# EAGLE board lopen-SR (EAGLE 5.11), part 1 of 2
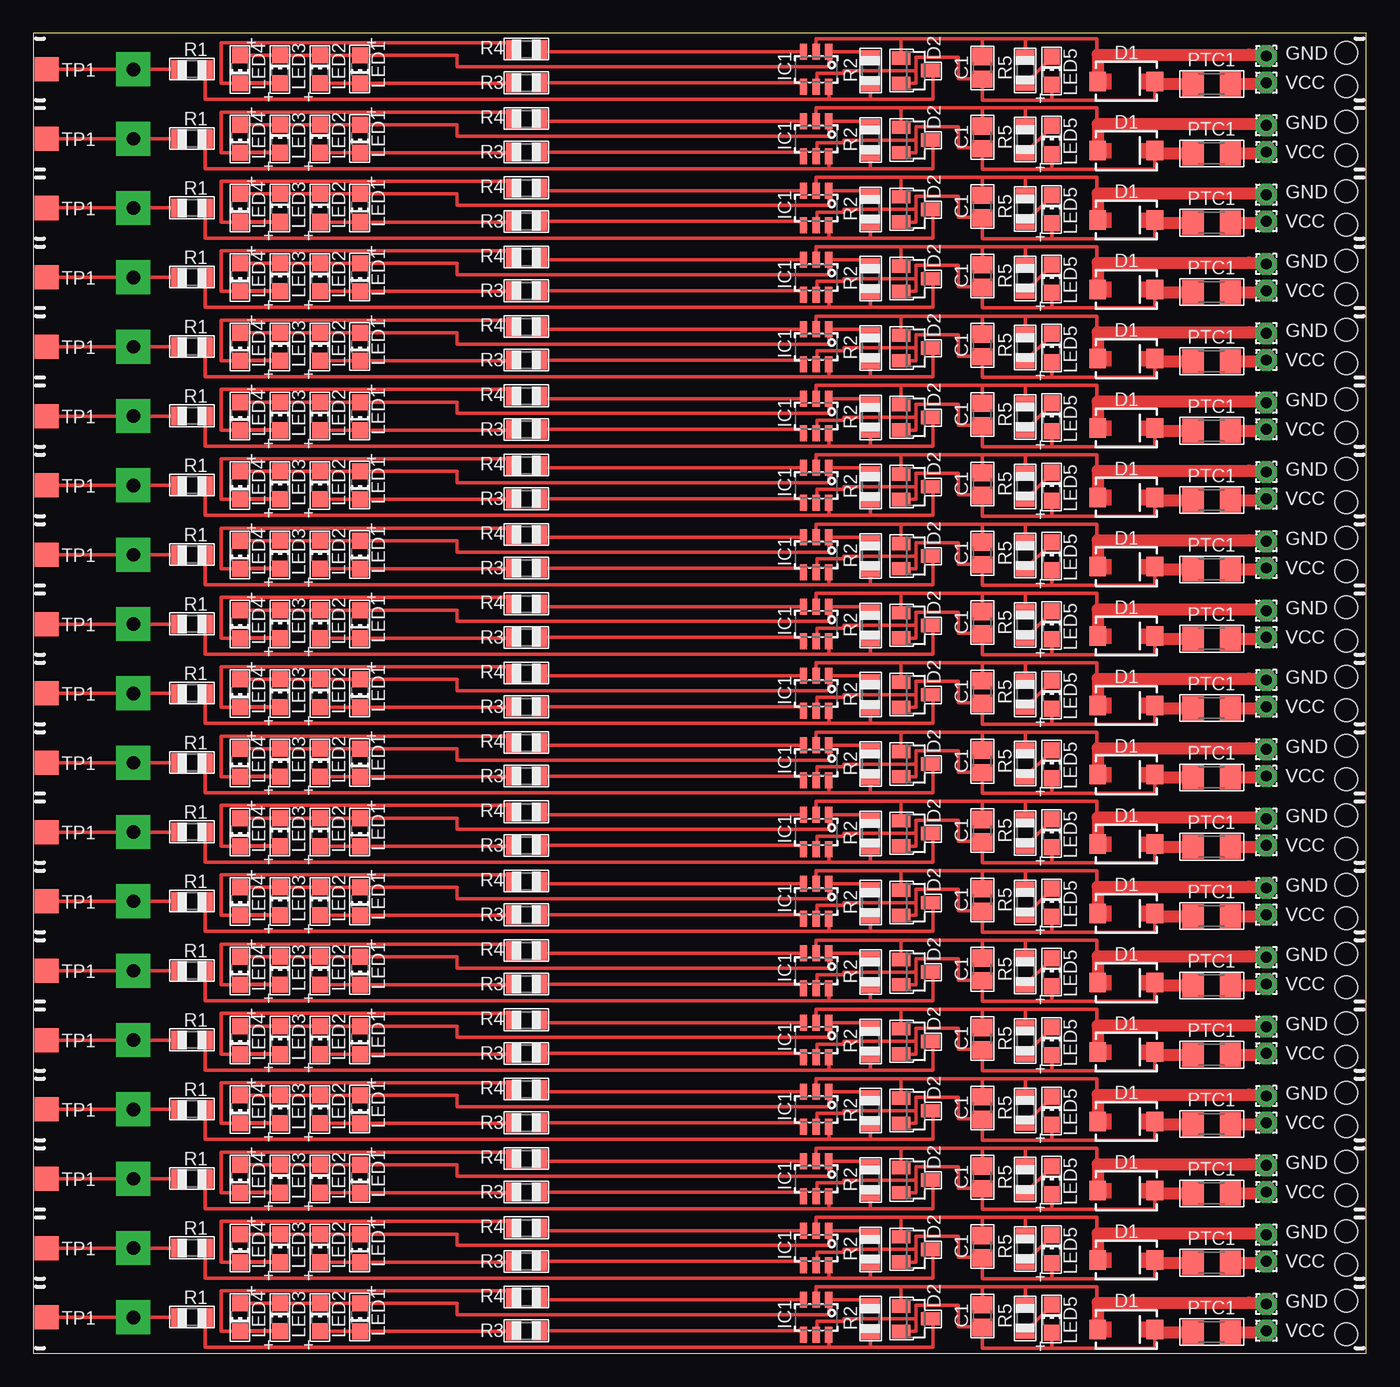
[diagram p0: board, top side]
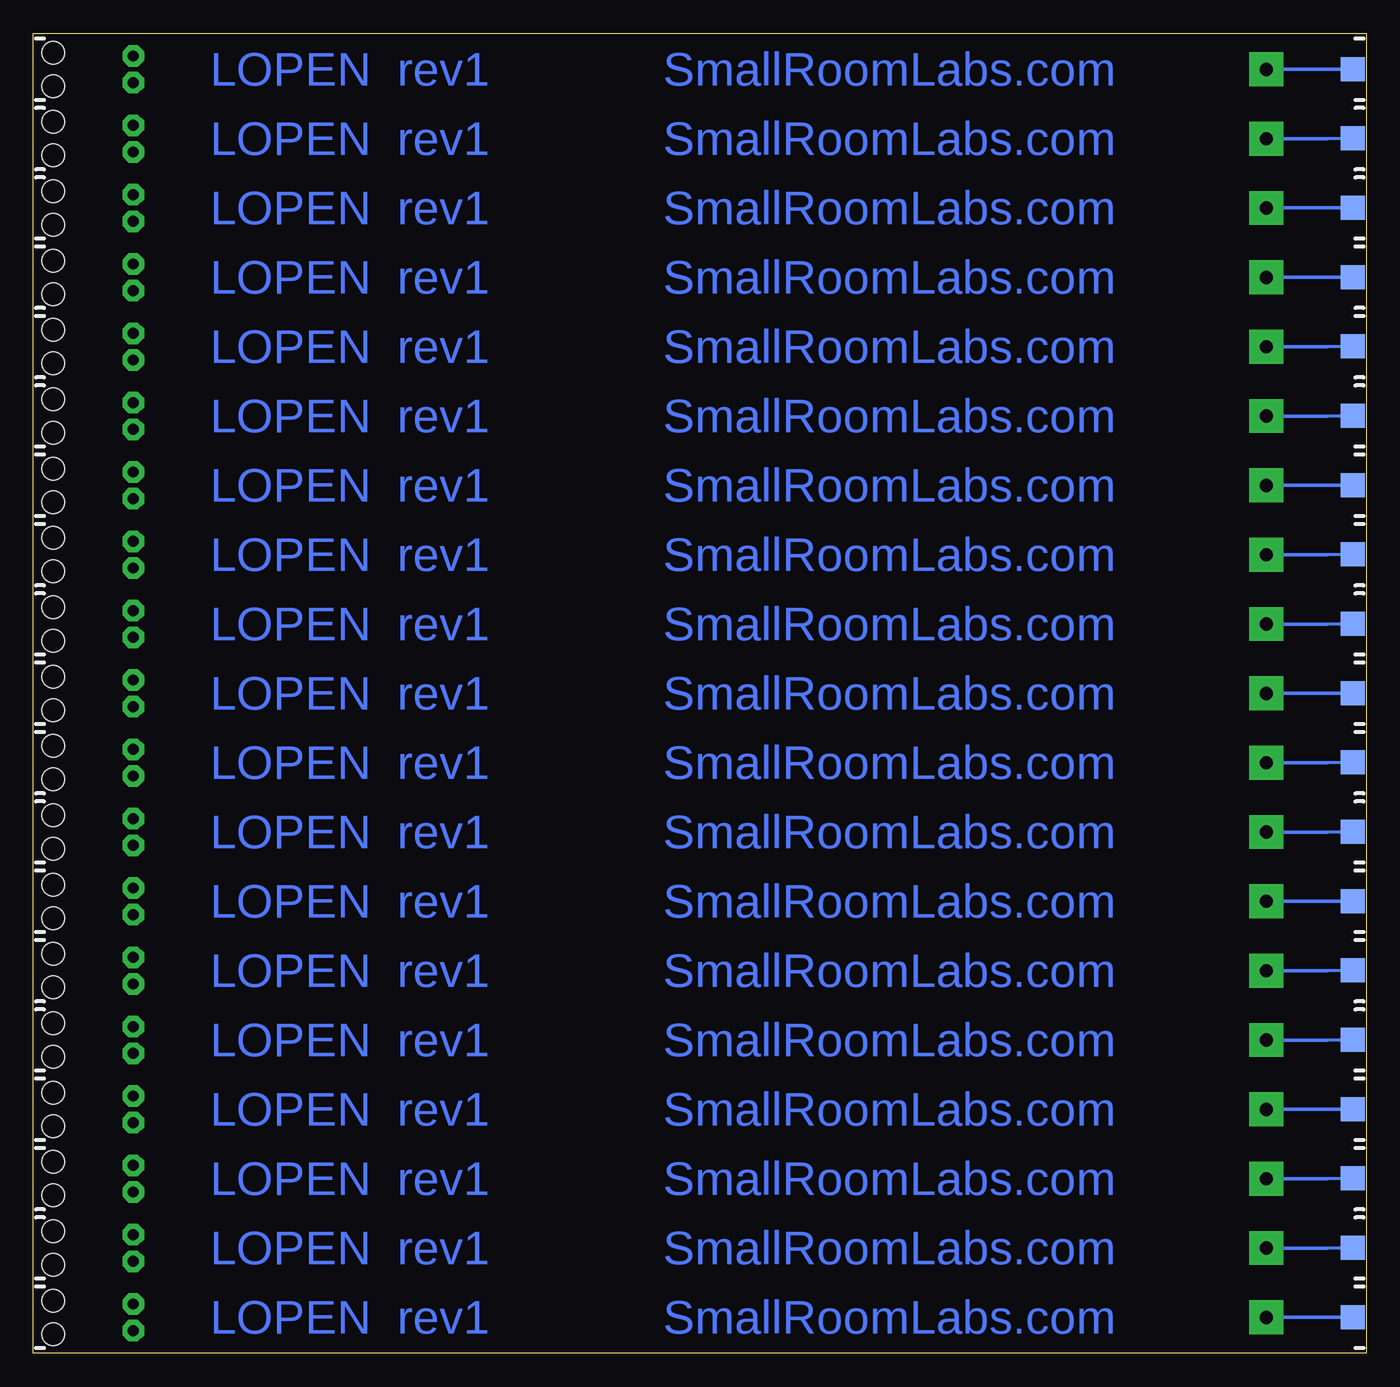
[diagram p1: board, bottom side, seen from below]

Size 100 x 99 mm. Coordinates in mm from the lower left corner, seen from the top.
Outline: 0,0 100,0 100,99 0,99 0,0
Copper layers (1*16): Top 0.035mm / dielectric 1.5mm / Bottom 0.035mm
Design rules "default": minimum track width 10mil, minimum drill 24mil, track to track 8mil, track to pad 8mil, pad to pad 8mil, via to via 8mil, smd to smd 8mil, copper to edge 40mil, drill to drill 8mil, minimum pad ring 10mil, minimum via ring 8mil, stop-mask expansion 4mil, vias tented up to drill 0mil, thermal gap 10mil
Net classes: 0 default: width 0.152 mm, clearance 0.152 mm
Holes 1.7 mm at 98.5,3.95 98.5,1.45 98.5,9.15 98.5,6.65 98.5,14.35 98.5,11.85 98.5,19.55 98.5,17.05 98.5,24.75 98.5,22.25 98.5,29.95 98.5,27.45 98.5,35.15 98.5,32.65 98.5,40.35 98.5,37.85 98.5,45.55 98.5,43.05 98.5,50.75 98.5,48.25 98.5,55.95 98.5,53.45 98.5,61.15 98.5,58.65 98.5,66.35 98.5,63.85 98.5,71.55 98.5,69.05 98.5,76.75 98.5,74.25 98.5,81.95 98.5,79.45 98.5,87.15 98.5,84.65 98.5,92.35 98.5,89.85 98.5,97.55 98.5,95.05

## Footprints (pad centres in the part's own frame; a part is rotated, then mirrored left to right if it is on the bottom)
C0805 = smd 1.3 x 1.5: 1 -0.85,0; 2 0.85,0
SMA-DIODE = smd 1.27 x 1.47: A -2.15,0; C 2.15,0
SOT23 = smd 1 x 1.4: 1 -0.95,-1.1; 2 0.95,-1.1; 3 0,1.1
1,6/0,8 = drill 0.813 pad 1.6 octagon: 1 0,0
SOT23-6 = smd 0.55 x 1.2: 1 0.32,-1.3; 2 1.27,-1.3; 3 2.22,-1.3; 4 2.22,1.3; 5 1.27,1.3; 6 0.32,1.3
CHIP-LED0805 = smd 1.2 x 1.2: A 0,-1.05; C 0,1.05
1206 = smd 1.6 x 1.8: 1 -1.4,0; 2 1.4,0
R0805 = smd 1.1 x 1.4: 1 -1,0; 2 1,0
TP18SQ = smd 1.8 x 1.8: TP 0,0

## Placement (x,y rotation side)
C1  [C0805]  71.2,2.8 90 top
C2  [C0805]  71.2,8 90 top
C3  [C0805]  71.2,13.2 90 top
C4  [C0805]  71.2,18.4 90 top
C5  [C0805]  71.2,23.6 90 top
C6  [C0805]  71.2,28.8 90 top
C7  [C0805]  71.2,34 90 top
C8  [C0805]  71.2,39.2 90 top
C9  [C0805]  71.2,44.4 90 top
C10  [C0805]  71.2,49.6 90 top
C11  [C0805]  71.2,54.8 90 top
C12  [C0805]  71.2,60 90 top
C13  [C0805]  71.2,65.2 90 top
C14  [C0805]  71.2,70.4 90 top
C15  [C0805]  71.2,75.6 90 top
C16  [C0805]  71.2,80.8 90 top
C17  [C0805]  71.2,86 90 top
C18  [C0805]  71.2,91.2 90 top
C19  [C0805]  71.2,96.4 90 top
D1  [SMA-DIODE]  82,1.8 0 top
D2  BAV99LT  [SOT23]  66.2,2.6 270 top
D3  BAV99LT  [SOT23]  66.2,7.8 270 top
D4  [SMA-DIODE]  82,7 0 top
D5  BAV99LT  [SOT23]  66.2,13 270 top
D6  [SMA-DIODE]  82,12.2 0 top
D7  BAV99LT  [SOT23]  66.2,18.2 270 top
D8  [SMA-DIODE]  82,17.4 0 top
D9  BAV99LT  [SOT23]  66.2,23.4 270 top
D10  [SMA-DIODE]  82,22.6 0 top
D11  BAV99LT  [SOT23]  66.2,28.6 270 top
D12  [SMA-DIODE]  82,27.8 0 top
D13  BAV99LT  [SOT23]  66.2,33.8 270 top
D14  [SMA-DIODE]  82,33 0 top
D15  BAV99LT  [SOT23]  66.2,39 270 top
D16  [SMA-DIODE]  82,38.2 0 top
D17  BAV99LT  [SOT23]  66.2,44.2 270 top
D18  [SMA-DIODE]  82,43.4 0 top
D19  BAV99LT  [SOT23]  66.2,49.4 270 top
D20  [SMA-DIODE]  82,48.6 0 top
D21  BAV99LT  [SOT23]  66.2,54.6 270 top
D22  [SMA-DIODE]  82,53.8 0 top
D23  BAV99LT  [SOT23]  66.2,59.8 270 top
D24  [SMA-DIODE]  82,59 0 top
D25  BAV99LT  [SOT23]  66.2,65 270 top
D26  [SMA-DIODE]  82,64.2 0 top
D27  BAV99LT  [SOT23]  66.2,70.2 270 top
D28  [SMA-DIODE]  82,69.4 0 top
D29  BAV99LT  [SOT23]  66.2,75.4 270 top
D30  [SMA-DIODE]  82,74.6 0 top
D31  BAV99LT  [SOT23]  66.2,80.6 270 top
D32  [SMA-DIODE]  82,79.8 0 top
D33  BAV99LT  [SOT23]  66.2,85.8 270 top
D34  [SMA-DIODE]  82,85 0 top
D35  BAV99LT  [SOT23]  66.2,91 270 top
D36  [SMA-DIODE]  82,90.2 0 top
D37  BAV99LT  [SOT23]  66.2,96.2 270 top
D38  [SMA-DIODE]  82,95.4 0 top
GND  [1,6/0,8]  92.5,3.7 0 top
GND1  [1,6/0,8]  92.5,8.9 0 top
GND2  [1,6/0,8]  92.5,14.1 0 top
GND3  [1,6/0,8]  92.5,19.3 0 top
GND4  [1,6/0,8]  92.5,24.5 0 top
GND5  [1,6/0,8]  92.5,29.7 0 top
GND6  [1,6/0,8]  92.5,34.9 0 top
GND7  [1,6/0,8]  92.5,40.1 0 top
GND8  [1,6/0,8]  92.5,45.3 0 top
GND9  [1,6/0,8]  92.5,50.5 0 top
GND10  [1,6/0,8]  92.5,55.7 0 top
GND11  [1,6/0,8]  92.5,60.9 0 top
GND12  [1,6/0,8]  92.5,66.1 0 top
GND13  [1,6/0,8]  92.5,71.3 0 top
GND14  [1,6/0,8]  92.5,76.5 0 top
GND15  [1,6/0,8]  92.5,81.7 0 top
GND16  [1,6/0,8]  92.5,86.9 0 top
GND17  [1,6/0,8]  92.5,92.1 0 top
GND18  [1,6/0,8]  92.5,97.3 0 top
IC1  PIC10F200-SOT23  [SOT23-6]  60,2.7 180 top
IC2  PIC10F200-SOT23  [SOT23-6]  60,7.9 180 top
IC3  PIC10F200-SOT23  [SOT23-6]  60,13.1 180 top
IC4  PIC10F200-SOT23  [SOT23-6]  60,18.3 180 top
IC5  PIC10F200-SOT23  [SOT23-6]  60,23.5 180 top
IC6  PIC10F200-SOT23  [SOT23-6]  60,28.7 180 top
IC7  PIC10F200-SOT23  [SOT23-6]  60,33.9 180 top
IC8  PIC10F200-SOT23  [SOT23-6]  60,39.1 180 top
IC9  PIC10F200-SOT23  [SOT23-6]  60,44.3 180 top
IC10  PIC10F200-SOT23  [SOT23-6]  60,49.5 180 top
IC11  PIC10F200-SOT23  [SOT23-6]  60,54.7 180 top
IC12  PIC10F200-SOT23  [SOT23-6]  60,59.9 180 top
IC13  PIC10F200-SOT23  [SOT23-6]  60,65.1 180 top
IC14  PIC10F200-SOT23  [SOT23-6]  60,70.3 180 top
IC15  PIC10F200-SOT23  [SOT23-6]  60,75.5 180 top
IC16  PIC10F200-SOT23  [SOT23-6]  60,80.7 180 top
IC17  PIC10F200-SOT23  [SOT23-6]  60,85.9 180 top
IC18  PIC10F200-SOT23  [SOT23-6]  60,91.1 180 top
IC19  PIC10F200-SOT23  [SOT23-6]  60,96.3 180 top
LED1  [CHIP-LED0805]  24.5,2.7 180 top
LED2  [CHIP-LED0805]  21.5,2.7 0 top
LED3  [CHIP-LED0805]  18.5,2.7 0 top
LED4  [CHIP-LED0805]  15.5,2.7 180 top
LED5  [CHIP-LED0805]  76.4,2.6 0 top
LED6  [CHIP-LED0805]  24.5,7.9 180 top
LED7  [CHIP-LED0805]  21.5,7.9 0 top
LED8  [CHIP-LED0805]  18.5,7.9 0 top
LED9  [CHIP-LED0805]  15.5,7.9 180 top
LED10  [CHIP-LED0805]  76.4,7.8 0 top
LED11  [CHIP-LED0805]  24.5,13.1 180 top
LED12  [CHIP-LED0805]  21.5,13.1 0 top
LED13  [CHIP-LED0805]  18.5,13.1 0 top
LED14  [CHIP-LED0805]  15.5,13.1 180 top
LED15  [CHIP-LED0805]  76.4,13 0 top
LED16  [CHIP-LED0805]  24.5,18.3 180 top
LED17  [CHIP-LED0805]  21.5,18.3 0 top
LED18  [CHIP-LED0805]  18.5,18.3 0 top
LED19  [CHIP-LED0805]  15.5,18.3 180 top
LED20  [CHIP-LED0805]  76.4,18.2 0 top
LED21  [CHIP-LED0805]  24.5,23.5 180 top
LED22  [CHIP-LED0805]  21.5,23.5 0 top
LED23  [CHIP-LED0805]  18.5,23.5 0 top
LED24  [CHIP-LED0805]  15.5,23.5 180 top
LED25  [CHIP-LED0805]  76.4,23.4 0 top
LED26  [CHIP-LED0805]  24.5,28.7 180 top
LED27  [CHIP-LED0805]  21.5,28.7 0 top
LED28  [CHIP-LED0805]  18.5,28.7 0 top
LED29  [CHIP-LED0805]  15.5,28.7 180 top
LED30  [CHIP-LED0805]  76.4,28.6 0 top
LED31  [CHIP-LED0805]  24.5,33.9 180 top
LED32  [CHIP-LED0805]  21.5,33.9 0 top
LED33  [CHIP-LED0805]  18.5,33.9 0 top
LED34  [CHIP-LED0805]  15.5,33.9 180 top
LED35  [CHIP-LED0805]  76.4,33.8 0 top
LED36  [CHIP-LED0805]  24.5,39.1 180 top
LED37  [CHIP-LED0805]  21.5,39.1 0 top
LED38  [CHIP-LED0805]  18.5,39.1 0 top
LED39  [CHIP-LED0805]  15.5,39.1 180 top
LED40  [CHIP-LED0805]  76.4,39 0 top
LED41  [CHIP-LED0805]  24.5,44.3 180 top
LED42  [CHIP-LED0805]  21.5,44.3 0 top
LED43  [CHIP-LED0805]  18.5,44.3 0 top
LED44  [CHIP-LED0805]  15.5,44.3 180 top
LED45  [CHIP-LED0805]  76.4,44.2 0 top
LED46  [CHIP-LED0805]  24.5,49.5 180 top
LED47  [CHIP-LED0805]  21.5,49.5 0 top
LED48  [CHIP-LED0805]  18.5,49.5 0 top
LED49  [CHIP-LED0805]  15.5,49.5 180 top
LED50  [CHIP-LED0805]  76.4,49.4 0 top
LED51  [CHIP-LED0805]  24.5,54.7 180 top
LED52  [CHIP-LED0805]  21.5,54.7 0 top
LED53  [CHIP-LED0805]  18.5,54.7 0 top
LED54  [CHIP-LED0805]  15.5,54.7 180 top
LED55  [CHIP-LED0805]  76.4,54.6 0 top
LED56  [CHIP-LED0805]  24.5,59.9 180 top
LED57  [CHIP-LED0805]  21.5,59.9 0 top
LED58  [CHIP-LED0805]  18.5,59.9 0 top
LED59  [CHIP-LED0805]  15.5,59.9 180 top
LED60  [CHIP-LED0805]  76.4,59.8 0 top
LED61  [CHIP-LED0805]  24.5,65.1 180 top
LED62  [CHIP-LED0805]  21.5,65.1 0 top
LED63  [CHIP-LED0805]  18.5,65.1 0 top
LED64  [CHIP-LED0805]  15.5,65.1 180 top
LED65  [CHIP-LED0805]  76.4,65 0 top
LED66  [CHIP-LED0805]  24.5,70.3 180 top
LED67  [CHIP-LED0805]  21.5,70.3 0 top
LED68  [CHIP-LED0805]  18.5,70.3 0 top
LED69  [CHIP-LED0805]  15.5,70.3 180 top
LED70  [CHIP-LED0805]  76.4,70.2 0 top
LED71  [CHIP-LED0805]  24.5,75.5 180 top
LED72  [CHIP-LED0805]  21.5,75.5 0 top
LED73  [CHIP-LED0805]  18.5,75.5 0 top
LED74  [CHIP-LED0805]  15.5,75.5 180 top
LED75  [CHIP-LED0805]  76.4,75.4 0 top
LED76  [CHIP-LED0805]  24.5,80.7 180 top
LED77  [CHIP-LED0805]  21.5,80.7 0 top
LED78  [CHIP-LED0805]  18.5,80.7 0 top
LED79  [CHIP-LED0805]  15.5,80.7 180 top
LED80  [CHIP-LED0805]  76.4,80.6 0 top
LED81  [CHIP-LED0805]  24.5,85.9 180 top
LED82  [CHIP-LED0805]  21.5,85.9 0 top
LED83  [CHIP-LED0805]  18.5,85.9 0 top
LED84  [CHIP-LED0805]  15.5,85.9 180 top
LED85  [CHIP-LED0805]  76.4,85.8 0 top
LED86  [CHIP-LED0805]  24.5,91.1 180 top
LED87  [CHIP-LED0805]  21.5,91.1 0 top
LED88  [CHIP-LED0805]  18.5,91.1 0 top
LED89  [CHIP-LED0805]  15.5,91.1 180 top
LED90  [CHIP-LED0805]  76.4,91 0 top
LED91  [CHIP-LED0805]  24.5,96.3 180 top
LED92  [CHIP-LED0805]  21.5,96.3 0 top
LED93  [CHIP-LED0805]  18.5,96.3 0 top
LED94  [CHIP-LED0805]  15.5,96.3 180 top
LED95  [CHIP-LED0805]  76.4,96.2 0 top
PTC1  MC36205  [1206]  88.4,1.6 0 top
PTC2  MC36205  [1206]  88.4,6.8 0 top
PTC3  MC36205  [1206]  88.4,12 0 top
PTC4  MC36205  [1206]  88.4,17.2 0 top
PTC5  MC36205  [1206]  88.4,22.4 0 top
PTC6  MC36205  [1206]  88.4,27.6 0 top
PTC7  MC36205  [1206]  88.4,32.8 0 top
PTC8  MC36205  [1206]  88.4,38 0 top
PTC9  MC36205  [1206]  88.4,43.2 0 top
PTC10  MC36205  [1206]  88.4,48.4 0 top
PTC11  MC36205  [1206]  88.4,53.6 0 top
PTC12  MC36205  [1206]  88.4,58.8 0 top
PTC13  MC36205  [1206]  88.4,64 0 top
PTC14  MC36205  [1206]  88.4,69.2 0 top
PTC15  MC36205  [1206]  88.4,74.4 0 top
PTC16  MC36205  [1206]  88.4,79.6 0 top
PTC17  MC36205  [1206]  88.4,84.8 0 top
PTC18  MC36205  [1206]  88.4,90 0 top
PTC19  MC36205  [1206]  88.4,95.2 0 top
R1  [R0805]  11.9,2.7 180 top
R2  [R0805]  62.8,2.6 270 top
R3  [R0805]  37,1.7 0 top
R4  [R0805]  37,4.2 0 top
R5  [R0805]  74.42,2.63 270 top
R6  [R0805]  11.9,7.9 180 top
R7  [R0805]  62.8,7.8 270 top
R8  [R0805]  37,6.9 0 top
R9  [R0805]  37,9.4 0 top
R10  [R0805]  74.42,7.83 270 top
R11  [R0805]  11.9,13.1 180 top
R12  [R0805]  62.8,13 270 top
R13  [R0805]  37,12.1 0 top
R14  [R0805]  37,14.6 0 top
R15  [R0805]  74.42,13.03 270 top
R16  [R0805]  11.9,18.3 180 top
R17  [R0805]  62.8,18.2 270 top
R18  [R0805]  37,17.3 0 top
R19  [R0805]  37,19.8 0 top
R20  [R0805]  74.42,18.23 270 top
R21  [R0805]  11.9,23.5 180 top
R22  [R0805]  62.8,23.4 270 top
R23  [R0805]  37,22.5 0 top
R24  [R0805]  37,25 0 top
R25  [R0805]  74.42,23.43 270 top
R26  [R0805]  11.9,28.7 180 top
R27  [R0805]  62.8,28.6 270 top
R28  [R0805]  37,27.7 0 top
R29  [R0805]  37,30.2 0 top
R30  [R0805]  74.42,28.63 270 top
R31  [R0805]  11.9,33.9 180 top
R32  [R0805]  62.8,33.8 270 top
R33  [R0805]  37,32.9 0 top
R34  [R0805]  37,35.4 0 top
R35  [R0805]  74.42,33.83 270 top
R36  [R0805]  11.9,39.1 180 top
R37  [R0805]  62.8,39 270 top
R38  [R0805]  37,38.1 0 top
R39  [R0805]  37,40.6 0 top
R40  [R0805]  74.42,39.03 270 top
R41  [R0805]  11.9,44.3 180 top
R42  [R0805]  62.8,44.2 270 top
R43  [R0805]  37,43.3 0 top
R44  [R0805]  37,45.8 0 top
R45  [R0805]  74.42,44.23 270 top
R46  [R0805]  11.9,49.5 180 top
R47  [R0805]  62.8,49.4 270 top
R48  [R0805]  37,48.5 0 top
R49  [R0805]  37,51 0 top
R50  [R0805]  74.42,49.43 270 top
R51  [R0805]  11.9,54.7 180 top
R52  [R0805]  62.8,54.6 270 top
R53  [R0805]  37,53.7 0 top
R54  [R0805]  37,56.2 0 top
R55  [R0805]  74.42,54.63 270 top
R56  [R0805]  11.9,59.9 180 top
R57  [R0805]  62.8,59.8 270 top
R58  [R0805]  37,58.9 0 top
R59  [R0805]  37,61.4 0 top
R60  [R0805]  74.42,59.83 270 top
R61  [R0805]  11.9,65.1 180 top
R62  [R0805]  62.8,65 270 top
R63  [R0805]  37,64.1 0 top
R64  [R0805]  37,66.6 0 top
R65  [R0805]  74.42,65.03 270 top
R66  [R0805]  11.9,70.3 180 top
R67  [R0805]  62.8,70.2 270 top
R68  [R0805]  37,69.3 0 top
R69  [R0805]  37,71.8 0 top
R70  [R0805]  74.42,70.23 270 top
R71  [R0805]  11.9,75.5 180 top
R72  [R0805]  62.8,75.4 270 top
R73  [R0805]  37,74.5 0 top
R74  [R0805]  37,77 0 top
R75  [R0805]  74.42,75.43 270 top
R76  [R0805]  11.9,80.7 180 top
R77  [R0805]  62.8,80.6 270 top
R78  [R0805]  37,79.7 0 top
R79  [R0805]  37,82.2 0 top
R80  [R0805]  74.42,80.63 270 top
R81  [R0805]  11.9,85.9 180 top
R82  [R0805]  62.8,85.8 270 top
R83  [R0805]  37,84.9 0 top
R84  [R0805]  37,87.4 0 top
R85  [R0805]  74.42,85.83 270 top
R86  [R0805]  11.9,91.1 180 top
R87  [R0805]  62.8,91 270 top
R88  [R0805]  37,90.1 0 top
R89  [R0805]  37,92.6 0 top
R90  [R0805]  74.42,91.03 270 top
R91  [R0805]  11.9,96.3 180 top
R92  [R0805]  62.8,96.2 270 top
R93  [R0805]  37,95.3 0 top
R94  [R0805]  37,97.8 0 top
R95  [R0805]  74.42,96.23 270 top
TP1  TPSQTP18SQ  [TP18SQ]  1,2.7 0 top
TP2  TPSQTP18SQ  [TP18SQ]  1.02,2.71 0 bottom
TP3  TPSQTP18SQ  [TP18SQ]  1,7.9 0 top
TP4  TPSQTP18SQ  [TP18SQ]  1.02,7.91 0 bottom
TP5  TPSQTP18SQ  [TP18SQ]  1,13.1 0 top
TP6  TPSQTP18SQ  [TP18SQ]  1.02,13.11 0 bottom
TP7  TPSQTP18SQ  [TP18SQ]  1,18.3 0 top
TP8  TPSQTP18SQ  [TP18SQ]  1.02,18.31 0 bottom
TP9  TPSQTP18SQ  [TP18SQ]  1,23.5 0 top
TP10  TPSQTP18SQ  [TP18SQ]  1.02,23.51 0 bottom
TP11  TPSQTP18SQ  [TP18SQ]  1,28.7 0 top
TP12  TPSQTP18SQ  [TP18SQ]  1.02,28.71 0 bottom
TP13  TPSQTP18SQ  [TP18SQ]  1,33.9 0 top
TP14  TPSQTP18SQ  [TP18SQ]  1.02,33.91 0 bottom
TP15  TPSQTP18SQ  [TP18SQ]  1,39.1 0 top
TP16  TPSQTP18SQ  [TP18SQ]  1.02,39.11 0 bottom
TP17  TPSQTP18SQ  [TP18SQ]  1,44.3 0 top
TP18  TPSQTP18SQ  [TP18SQ]  1.02,44.31 0 bottom
TP19  TPSQTP18SQ  [TP18SQ]  1,49.5 0 top
TP20  TPSQTP18SQ  [TP18SQ]  1.02,49.51 0 bottom
TP21  TPSQTP18SQ  [TP18SQ]  1,54.7 0 top
TP22  TPSQTP18SQ  [TP18SQ]  1.02,54.71 0 bottom
TP23  TPSQTP18SQ  [TP18SQ]  1,59.9 0 top
TP24  TPSQTP18SQ  [TP18SQ]  1.02,59.91 0 bottom
TP25  TPSQTP18SQ  [TP18SQ]  1,65.1 0 top
TP26  TPSQTP18SQ  [TP18SQ]  1.02,65.11 0 bottom
TP27  TPSQTP18SQ  [TP18SQ]  1,70.3 0 top
TP28  TPSQTP18SQ  [TP18SQ]  1.02,70.31 0 bottom
TP29  TPSQTP18SQ  [TP18SQ]  1,75.5 0 top
TP30  TPSQTP18SQ  [TP18SQ]  1.02,75.51 0 bottom
TP31  TPSQTP18SQ  [TP18SQ]  1,80.7 0 top
TP32  TPSQTP18SQ  [TP18SQ]  1.02,80.71 0 bottom
TP33  TPSQTP18SQ  [TP18SQ]  1,85.9 0 top
TP34  TPSQTP18SQ  [TP18SQ]  1.02,85.91 0 bottom
TP35  TPSQTP18SQ  [TP18SQ]  1,91.1 0 top
TP36  TPSQTP18SQ  [TP18SQ]  1.02,91.11 0 bottom
TP37  TPSQTP18SQ  [TP18SQ]  1,96.3 0 top
TP38  TPSQTP18SQ  [TP18SQ]  1.02,96.31 0 bottom
VCC  [1,6/0,8]  92.5,1.7 0 top
VCC1  [1,6/0,8]  92.5,6.9 0 top
VCC2  [1,6/0,8]  92.5,12.1 0 top
VCC3  [1,6/0,8]  92.5,17.3 0 top
VCC4  [1,6/0,8]  92.5,22.5 0 top
VCC5  [1,6/0,8]  92.5,27.7 0 top
VCC6  [1,6/0,8]  92.5,32.9 0 top
VCC7  [1,6/0,8]  92.5,38.1 0 top
VCC8  [1,6/0,8]  92.5,43.3 0 top
VCC9  [1,6/0,8]  92.5,48.5 0 top
VCC10  [1,6/0,8]  92.5,53.7 0 top
VCC11  [1,6/0,8]  92.5,58.9 0 top
VCC12  [1,6/0,8]  92.5,64.1 0 top
VCC13  [1,6/0,8]  92.5,69.3 0 top
VCC14  [1,6/0,8]  92.5,74.5 0 top
VCC15  [1,6/0,8]  92.5,79.7 0 top
VCC16  [1,6/0,8]  92.5,84.9 0 top
VCC17  [1,6/0,8]  92.5,90.1 0 top
VCC18  [1,6/0,8]  92.5,95.3 0 top

## Library data of the parts
C1-C19 LED1-LED95 R1-R95 = adafruit
D1 D4 D6 D8 D10 D12 D14 D16 D18 D20 D22 D24 D26 D28 D30 D32 D34 D36 D38 = SparkFun
D2 D3 D5 D7 D9 D11 D13 D15 D17 D19 D21 D23 D25 D27 D29 D31 D33 D35 D37 = diode
GND GND1-GND18 VCC VCC1-VCC18 = wirepad
IC1-IC19 = SmallRoomLabs
PTC1-PTC19 = microbuilder
TP1-TP38 = testpad

## Nets
GND: C1.2 D1.A D2.1 GND.1 IC1.2 R5.1
GND1: C2.2 D3.1 D4.A GND1.1 IC2.2 R10.1
GND2: C3.2 D5.1 D6.A GND2.1 IC3.2 R15.1
GND3: C4.2 D7.1 D8.A GND3.1 IC4.2 R20.1
GND4: C5.2 D9.1 D10.A GND4.1 IC5.2 R25.1
GND5: C6.2 D11.1 D12.A GND5.1 IC6.2 R30.1
GND6: C7.2 D13.1 D14.A GND6.1 IC7.2 R35.1
GND7: C8.2 D15.1 D16.A GND7.1 IC8.2 R40.1
GND8: C9.2 D17.1 D18.A GND8.1 IC9.2 R45.1
GND9: C10.2 D19.1 D20.A GND9.1 IC10.2 R50.1
GND10: C11.2 D21.1 D22.A GND10.1 IC11.2 R55.1
GND11: C12.2 D23.1 D24.A GND11.1 IC12.2 R60.1
GND12: C13.2 D25.1 D26.A GND12.1 IC13.2 R65.1
GND13: C14.2 D27.1 D28.A GND13.1 IC14.2 R70.1
GND14: C15.2 D29.1 D30.A GND14.1 IC15.2 R75.1
GND15: C16.2 D31.1 D32.A GND15.1 IC16.2 R80.1
GND16: C17.2 D33.1 D34.A GND16.1 IC17.2 R85.1
GND17: C18.2 D35.1 D36.A GND17.1 IC18.2 R90.1
GND18: C19.2 D37.1 D38.A GND18.1 IC19.2 R95.1
LED_CENTER: IC1.1 LED1.A LED2.C LED3.C LED4.A R2.1
LED_CENTER1: IC2.1 LED6.A LED7.C LED8.C LED9.A R7.1
LED_CENTER2: IC3.1 LED11.A LED12.C LED13.C LED14.A R12.1
LED_CENTER3: IC4.1 LED16.A LED17.C LED18.C LED19.A R17.1
LED_CENTER4: IC5.1 LED21.A LED22.C LED23.C LED24.A R22.1
LED_CENTER5: IC6.1 LED26.A LED27.C LED28.C LED29.A R27.1
LED_CENTER6: IC7.1 LED31.A LED32.C LED33.C LED34.A R32.1
LED_CENTER7: IC8.1 LED36.A LED37.C LED38.C LED39.A R37.1
LED_CENTER8: IC9.1 LED41.A LED42.C LED43.C LED44.A R42.1
LED_CENTER9: IC10.1 LED46.A LED47.C LED48.C LED49.A R47.1
LED_CENTER10: IC11.1 LED51.A LED52.C LED53.C LED54.A R52.1
LED_CENTER11: IC12.1 LED56.A LED57.C LED58.C LED59.A R57.1
LED_CENTER12: IC13.1 LED61.A LED62.C LED63.C LED64.A R62.1
LED_CENTER13: IC14.1 LED66.A LED67.C LED68.C LED69.A R67.1
LED_CENTER14: IC15.1 LED71.A LED72.C LED73.C LED74.A R72.1
LED_CENTER15: IC16.1 LED76.A LED77.C LED78.C LED79.A R77.1
LED_CENTER16: IC17.1 LED81.A LED82.C LED83.C LED84.A R82.1
LED_CENTER17: IC18.1 LED86.A LED87.C LED88.C LED89.A R87.1
LED_CENTER18: IC19.1 LED91.A LED92.C LED93.C LED94.A R92.1
LED_ONE: IC1.4 R3.2
LED_ONE1: IC2.4 R8.2
LED_ONE2: IC3.4 R13.2
LED_ONE3: IC4.4 R18.2
LED_ONE4: IC5.4 R23.2
LED_ONE5: IC6.4 R28.2
LED_ONE6: IC7.4 R33.2
LED_ONE7: IC8.4 R38.2
LED_ONE8: IC9.4 R43.2
LED_ONE9: IC10.4 R48.2
LED_ONE10: IC11.4 R53.2
LED_ONE11: IC12.4 R58.2
LED_ONE12: IC13.4 R63.2
LED_ONE13: IC14.4 R68.2
LED_ONE14: IC15.4 R73.2
LED_ONE15: IC16.4 R78.2
LED_ONE16: IC17.4 R83.2
LED_ONE17: IC18.4 R88.2
LED_ONE18: IC19.4 R93.2
LED_TWO: IC1.3 R4.2
LED_TWO1: IC2.3 R9.2
LED_TWO2: IC3.3 R14.2
LED_TWO3: IC4.3 R19.2
LED_TWO4: IC5.3 R24.2
LED_TWO5: IC6.3 R29.2
LED_TWO6: IC7.3 R34.2
LED_TWO7: IC8.3 R39.2
LED_TWO8: IC9.3 R44.2
LED_TWO9: IC10.3 R49.2
LED_TWO10: IC11.3 R54.2
LED_TWO11: IC12.3 R59.2
LED_TWO12: IC13.3 R64.2
LED_TWO13: IC14.3 R69.2
LED_TWO14: IC15.3 R74.2
LED_TWO15: IC16.3 R79.2
LED_TWO16: IC17.3 R84.2
LED_TWO17: IC18.3 R89.2
LED_TWO18: IC19.3 R94.2
N$1: LED5.C R5.2
N$2: PTC1.2 VCC.1
N$3: LED6.C LED7.A R8.1
N$4: LED8.A LED9.C R9.1
N$5: LED1.C LED2.A R3.1
N$6: LED3.A LED4.C R4.1
N$7: R6.2 TP3.TP TP4.TP
N$8: LED10.C R10.2
N$9: R1.2 TP1.TP TP2.TP
N$10: PTC2.2 VCC1.1
N$11: LED11.C LED12.A R13.1
N$12: LED13.A LED14.C R14.1
N$13: R11.2 TP5.TP TP6.TP
N$14: LED15.C R15.2
N$15: PTC3.2 VCC2.1
N$16: LED16.C LED17.A R18.1
N$17: LED18.A LED19.C R19.1
N$18: R16.2 TP7.TP TP8.TP
N$19: LED20.C R20.2
N$20: PTC4.2 VCC3.1
N$21: LED21.C LED22.A R23.1
N$22: LED23.A LED24.C R24.1
N$23: R21.2 TP9.TP TP10.TP
N$24: LED25.C R25.2
N$25: PTC5.2 VCC4.1
N$26: LED26.C LED27.A R28.1
N$27: LED28.A LED29.C R29.1
N$28: R26.2 TP11.TP TP12.TP
N$29: LED30.C R30.2
N$30: PTC6.2 VCC5.1
N$31: LED31.C LED32.A R33.1
N$32: LED33.A LED34.C R34.1
N$33: R31.2 TP13.TP TP14.TP
N$34: LED35.C R35.2
N$35: PTC7.2 VCC6.1
N$36: LED36.C LED37.A R38.1
N$37: LED38.A LED39.C R39.1
N$38: R36.2 TP15.TP TP16.TP
N$39: LED40.C R40.2
N$40: PTC8.2 VCC7.1
N$41: LED41.C LED42.A R43.1
N$42: LED43.A LED44.C R44.1
N$43: R41.2 TP17.TP TP18.TP
N$44: LED45.C R45.2
N$45: PTC9.2 VCC8.1
N$46: LED46.C LED47.A R48.1
N$47: LED48.A LED49.C R49.1
N$48: R46.2 TP19.TP TP20.TP
N$49: LED50.C R50.2
N$50: PTC10.2 VCC9.1
N$51: LED51.C LED52.A R53.1
N$52: LED53.A LED54.C R54.1
N$53: R51.2 TP21.TP TP22.TP
N$54: LED55.C R55.2
N$55: PTC11.2 VCC10.1
N$56: LED56.C LED57.A R58.1
N$57: LED58.A LED59.C R59.1
N$58: R56.2 TP23.TP TP24.TP
N$59: LED60.C R60.2
N$60: PTC12.2 VCC11.1
N$61: LED61.C LED62.A R63.1
N$62: LED63.A LED64.C R64.1
N$63: R61.2 TP25.TP TP26.TP
N$64: LED65.C R65.2
N$65: PTC13.2 VCC12.1
N$66: LED66.C LED67.A R68.1
N$67: LED68.A LED69.C R69.1
N$68: R66.2 TP27.TP TP28.TP
N$69: LED70.C R70.2
N$70: PTC14.2 VCC13.1
N$71: LED71.C LED72.A R73.1
N$72: LED73.A LED74.C R74.1
N$73: R71.2 TP29.TP TP30.TP
N$74: LED75.C R75.2
N$75: PTC15.2 VCC14.1
N$76: LED76.C LED77.A R78.1
N$77: LED78.A LED79.C R79.1
N$78: R76.2 TP31.TP TP32.TP
N$79: LED80.C R80.2
N$80: PTC16.2 VCC15.1
N$81: LED81.C LED82.A R83.1
N$82: LED83.A LED84.C R84.1
N$83: R81.2 TP33.TP TP34.TP
N$84: LED85.C R85.2
N$85: PTC17.2 VCC16.1
N$86: LED86.C LED87.A R88.1
N$87: LED88.A LED89.C R89.1
N$88: R86.2 TP35.TP TP36.TP
N$89: LED90.C R90.2
N$90: PTC18.2 VCC17.1
N$91: LED91.C LED92.A R93.1
N$92: LED93.A LED94.C R94.1
N$93: R91.2 TP37.TP TP38.TP
N$94: LED95.C R95.2
N$95: PTC19.2 VCC18.1
SENSE: D2.3 IC1.6 R1.1 R2.2
SENSE1: D3.3 IC2.6 R6.1 R7.2
SENSE2: D5.3 IC3.6 R11.1 R12.2
SENSE3: D7.3 IC4.6 R16.1 R17.2
SENSE4: D9.3 IC5.6 R21.1 R22.2
SENSE5: D11.3 IC6.6 R26.1 R27.2
SENSE6: D13.3 IC7.6 R31.1 R32.2
SENSE7: D15.3 IC8.6 R36.1 R37.2
SENSE8: D17.3 IC9.6 R41.1 R42.2
SENSE9: D19.3 IC10.6 R46.1 R47.2
SENSE10: D21.3 IC11.6 R51.1 R52.2
SENSE11: D23.3 IC12.6 R56.1 R57.2
SENSE12: D25.3 IC13.6 R61.1 R62.2
SENSE13: D27.3 IC14.6 R66.1 R67.2
SENSE14: D29.3 IC15.6 R71.1 R72.2
SENSE15: D31.3 IC16.6 R76.1 R77.2
SENSE16: D33.3 IC17.6 R81.1 R82.2
SENSE17: D35.3 IC18.6 R86.1 R87.2
SENSE18: D37.3 IC19.6 R91.1 R92.2
VCC19: C1.1 D1.C D2.2 IC1.5 LED5.A PTC1.1
VCC20: C2.1 D3.2 D4.C IC2.5 LED10.A PTC2.1
VCC21: C3.1 D5.2 D6.C IC3.5 LED15.A PTC3.1
VCC22: C4.1 D7.2 D8.C IC4.5 LED20.A PTC4.1
VCC23: C5.1 D9.2 D10.C IC5.5 LED25.A PTC5.1
VCC24: C6.1 D11.2 D12.C IC6.5 LED30.A PTC6.1
VCC25: C7.1 D13.2 D14.C IC7.5 LED35.A PTC7.1
VCC26: C8.1 D15.2 D16.C IC8.5 LED40.A PTC8.1
VCC27: C9.1 D17.2 D18.C IC9.5 LED45.A PTC9.1
VCC28: C10.1 D19.2 D20.C IC10.5 LED50.A PTC10.1
VCC29: C11.1 D21.2 D22.C IC11.5 LED55.A PTC11.1
VCC30: C12.1 D23.2 D24.C IC12.5 LED60.A PTC12.1
VCC31: C13.1 D25.2 D26.C IC13.5 LED65.A PTC13.1
VCC32: C14.1 D27.2 D28.C IC14.5 LED70.A PTC14.1
VCC33: C15.1 D29.2 D30.C IC15.5 LED75.A PTC15.1
VCC34: C16.1 D31.2 D32.C IC16.5 LED80.A PTC16.1
VCC35: C17.1 D33.2 D34.C IC17.5 LED85.A PTC17.1
VCC36: C18.1 D35.2 D36.C IC18.5 LED90.A PTC18.1
VCC37: C19.1 D37.2 D38.C IC19.5 LED95.A PTC19.1

## Tracks (layer width: path | path; a pad name or v marks a point on that pad's centre or on a via)
GND
  Top 0.254: IC1.2 58.73,5 65,5 | 65,5 71.2,5 | 71.2,5 C1.2 71.2,5 | D2.1 65.1,5 65,5 | 71.2,5 74.42,5 | 92.5,3.8 GND.1 | 74.42,5 R5.1 | 74.42,5 79.8,5 79.8,3.8 79.85,3.8
  Top 0.914: 92.5,3.8 91.2,3.8 79.85,3.8 D1.A
GND1
  Top 0.254: IC2.2 58.73,10.2 65,10.2 | 65,10.2 71.2,10.2 | 71.2,10.2 C2.2 71.2,10.2 | D3.1 65.1,10.2 65,10.2 | 71.2,10.2 74.42,10.2 | 92.5,9 GND1.1 | 74.42,10.2 R10.1 | 74.42,10.2 79.8,10.2 79.8,9 79.85,9
  Top 0.914: 92.5,9 91.2,9 79.85,9 D4.A
GND2
  Top 0.254: IC3.2 58.73,15.4 65,15.4 | 65,15.4 71.2,15.4 | 71.2,15.4 C3.2 71.2,15.4 | D5.1 65.1,15.4 65,15.4 | 71.2,15.4 74.42,15.4 | 92.5,14.2 GND2.1 | 74.42,15.4 R15.1 | 74.42,15.4 79.8,15.4 79.8,14.2 79.85,14.2
  Top 0.914: 92.5,14.2 91.2,14.2 79.85,14.2 D6.A
GND3
  Top 0.254: IC4.2 58.73,20.6 65,20.6 | 65,20.6 71.2,20.6 | 71.2,20.6 C4.2 71.2,20.6 | D7.1 65.1,20.6 65,20.6 | 71.2,20.6 74.42,20.6 | 92.5,19.4 GND3.1 | 74.42,20.6 R20.1 | 74.42,20.6 79.8,20.6 79.8,19.4 79.85,19.4
  Top 0.914: 92.5,19.4 91.2,19.4 79.85,19.4 D8.A
GND4
  Top 0.254: IC5.2 58.73,25.8 65,25.8 | 65,25.8 71.2,25.8 | 71.2,25.8 C5.2 71.2,25.8 | D9.1 65.1,25.8 65,25.8 | 71.2,25.8 74.42,25.8 | 92.5,24.6 GND4.1 | 74.42,25.8 R25.1 | 74.42,25.8 79.8,25.8 79.8,24.6 79.85,24.6
  Top 0.914: 92.5,24.6 91.2,24.6 79.85,24.6 D10.A
GND5
  Top 0.254: IC6.2 58.73,31 65,31 | 65,31 71.2,31 | 71.2,31 C6.2 71.2,31 | D11.1 65.1,31 65,31 | 71.2,31 74.42,31 | 92.5,29.8 GND5.1 | 74.42,31 R30.1 | 74.42,31 79.8,31 79.8,29.8 79.85,29.8
  Top 0.914: 92.5,29.8 91.2,29.8 79.85,29.8 D12.A
GND6
  Top 0.254: IC7.2 58.73,36.2 65,36.2 | 65,36.2 71.2,36.2 | 71.2,36.2 C7.2 71.2,36.2 | D13.1 65.1,36.2 65,36.2 | 71.2,36.2 74.42,36.2 | 92.5,35 GND6.1 | 74.42,36.2 R35.1 | 74.42,36.2 79.8,36.2 79.8,35 79.85,35
  Top 0.914: 92.5,35 91.2,35 79.85,35 D14.A
GND7
  Top 0.254: IC8.2 58.73,41.4 65,41.4 | 65,41.4 71.2,41.4 | 71.2,41.4 C8.2 71.2,41.4 | D15.1 65.1,41.4 65,41.4 | 71.2,41.4 74.42,41.4 | 92.5,40.2 GND7.1 | 74.42,41.4 R40.1 | 74.42,41.4 79.8,41.4 79.8,40.2 79.85,40.2
  Top 0.914: 92.5,40.2 91.2,40.2 79.85,40.2 D16.A
GND8
  Top 0.254: IC9.2 58.73,46.6 65,46.6 | 65,46.6 71.2,46.6 | 71.2,46.6 C9.2 71.2,46.6 | D17.1 65.1,46.6 65,46.6 | 71.2,46.6 74.42,46.6 | 92.5,45.4 GND8.1 | 74.42,46.6 R45.1 | 74.42,46.6 79.8,46.6 79.8,45.4 79.85,45.4
  Top 0.914: 92.5,45.4 91.2,45.4 79.85,45.4 D18.A
GND9
  Top 0.254: IC10.2 58.73,51.8 65,51.8 | 65,51.8 71.2,51.8 | 71.2,51.8 C10.2 71.2,51.8 | D19.1 65.1,51.8 65,51.8 | 71.2,51.8 74.42,51.8 | 92.5,50.6 GND9.1 | 74.42,51.8 R50.1 | 74.42,51.8 79.8,51.8 79.8,50.6 79.85,50.6
  Top 0.914: 92.5,50.6 91.2,50.6 79.85,50.6 D20.A
GND10
  Top 0.254: IC11.2 58.73,57 65,57 | 65,57 71.2,57 | 71.2,57 C11.2 71.2,57 | D21.1 65.1,57 65,57 | 71.2,57 74.42,57 | 92.5,55.8 GND10.1 | 74.42,57 R55.1 | 74.42,57 79.8,57 79.8,55.8 79.85,55.8
  Top 0.914: 92.5,55.8 91.2,55.8 79.85,55.8 D22.A
GND11
  Top 0.254: IC12.2 58.73,62.2 65,62.2 | 65,62.2 71.2,62.2 | 71.2,62.2 C12.2 71.2,62.2 | D23.1 65.1,62.2 65,62.2 | 71.2,62.2 74.42,62.2 | 92.5,61 GND11.1 | 74.42,62.2 R60.1 | 74.42,62.2 79.8,62.2 79.8,61 79.85,61
  Top 0.914: 92.5,61 91.2,61 79.85,61 D24.A
GND12
  Top 0.254: IC13.2 58.73,67.4 65,67.4 | 65,67.4 71.2,67.4 | 71.2,67.4 C13.2 71.2,67.4 | D25.1 65.1,67.4 65,67.4 | 71.2,67.4 74.42,67.4 | 92.5,66.2 GND12.1 | 74.42,67.4 R65.1 | 74.42,67.4 79.8,67.4 79.8,66.2 79.85,66.2
  Top 0.914: 92.5,66.2 91.2,66.2 79.85,66.2 D26.A
GND13
  Top 0.254: IC14.2 58.73,72.6 65,72.6 | 65,72.6 71.2,72.6 | 71.2,72.6 C14.2 71.2,72.6 | D27.1 65.1,72.6 65,72.6 | 71.2,72.6 74.42,72.6 | 92.5,71.4 GND13.1 | 74.42,72.6 R70.1 | 74.42,72.6 79.8,72.6 79.8,71.4 79.85,71.4
  Top 0.914: 92.5,71.4 91.2,71.4 79.85,71.4 D28.A
GND14
  Top 0.254: IC15.2 58.73,77.8 65,77.8 | 65,77.8 71.2,77.8 | 71.2,77.8 C15.2 71.2,77.8 | D29.1 65.1,77.8 65,77.8 | 71.2,77.8 74.42,77.8 | 92.5,76.6 GND14.1 | 74.42,77.8 R75.1 | 74.42,77.8 79.8,77.8 79.8,76.6 79.85,76.6
  Top 0.914: 92.5,76.6 91.2,76.6 79.85,76.6 D30.A
GND15
  Top 0.254: IC16.2 58.73,83 65,83 | 65,83 71.2,83 | 71.2,83 C16.2 71.2,83 | D31.1 65.1,83 65,83 | 71.2,83 74.42,83 | 92.5,81.8 GND15.1 | 74.42,83 R80.1 | 74.42,83 79.8,83 79.8,81.8 79.85,81.8
  Top 0.914: 92.5,81.8 91.2,81.8 79.85,81.8 D32.A
GND16
  Top 0.254: IC17.2 58.73,88.2 65,88.2 | 65,88.2 71.2,88.2 | 71.2,88.2 C17.2 71.2,88.2 | D33.1 65.1,88.2 65,88.2 | 71.2,88.2 74.42,88.2 | 92.5,87 GND16.1 | 74.42,88.2 R85.1 | 74.42,88.2 79.8,88.2 79.8,87 79.85,87
  Top 0.914: 92.5,87 91.2,87 79.85,87 D34.A
GND17
  Top 0.254: IC18.2 58.73,93.4 65,93.4 | 65,93.4 71.2,93.4 | 71.2,93.4 C18.2 71.2,93.4 | D35.1 65.1,93.4 65,93.4 | 71.2,93.4 74.42,93.4 | 92.5,92.2 GND17.1 | 74.42,93.4 R90.1 | 74.42,93.4 79.8,93.4 79.8,92.2 79.85,92.2
  Top 0.914: 92.5,92.2 91.2,92.2 79.85,92.2 D36.A
GND18
  Top 0.254: IC19.2 58.73,98.6 65,98.6 | 65,98.6 71.2,98.6 | 71.2,98.6 C19.2 71.2,98.6 | D37.1 65.1,98.6 65,98.6 | 71.2,98.6 74.42,98.6 | 92.5,97.4 GND18.1 | 74.42,98.6 R95.1 | 74.42,98.6 79.8,98.6 79.8,97.4 79.85,97.4
  Top 0.914: 92.5,97.4 91.2,97.4 79.85,97.4 D38.A
LED_CENTER
  Top 0.254: LED4.A LED3.C LED2.C LED1.A 31.8,3.75 31.8,2.9 59.68,2.9 IC1.1 62.5,4
  Top 0.3: 62.5,4 R2.1
LED_CENTER1
  Top 0.254: LED9.A LED8.C LED7.C LED6.A 31.8,8.95 31.8,8.1 59.68,8.1 IC2.1 62.5,9.2
  Top 0.3: 62.5,9.2 R7.1
LED_CENTER2
  Top 0.254: LED14.A LED13.C LED12.C LED11.A 31.8,14.15 31.8,13.3 59.68,13.3 IC3.1 62.5,14.4
  Top 0.3: 62.5,14.4 R12.1
LED_CENTER3
  Top 0.254: LED19.A LED18.C LED17.C LED16.A 31.8,19.35 31.8,18.5 59.68,18.5 IC4.1 62.5,19.6
  Top 0.3: 62.5,19.6 R17.1
LED_CENTER4
  Top 0.254: LED24.A LED23.C LED22.C LED21.A 31.8,24.55 31.8,23.7 59.68,23.7 IC5.1 62.5,24.8
  Top 0.3: 62.5,24.8 R22.1
LED_CENTER5
  Top 0.254: LED29.A LED28.C LED27.C LED26.A 31.8,29.75 31.8,28.9 59.68,28.9 IC6.1 62.5,30
  Top 0.3: 62.5,30 R27.1
LED_CENTER6
  Top 0.254: LED34.A LED33.C LED32.C LED31.A 31.8,34.95 31.8,34.1 59.68,34.1 IC7.1 62.5,35.2
  Top 0.3: 62.5,35.2 R32.1
LED_CENTER7
  Top 0.254: LED39.A LED38.C LED37.C LED36.A 31.8,40.15 31.8,39.3 59.68,39.3 IC8.1 62.5,40.4
  Top 0.3: 62.5,40.4 R37.1
LED_CENTER8
  Top 0.254: LED44.A LED43.C LED42.C LED41.A 31.8,45.35 31.8,44.5 59.68,44.5 IC9.1 62.5,45.6
  Top 0.3: 62.5,45.6 R42.1
LED_CENTER9
  Top 0.254: LED49.A LED48.C LED47.C LED46.A 31.8,50.55 31.8,49.7 59.68,49.7 IC10.1 62.5,50.8
  Top 0.3: 62.5,50.8 R47.1
LED_CENTER10
  Top 0.254: LED54.A LED53.C LED52.C LED51.A 31.8,55.75 31.8,54.9 59.68,54.9 IC11.1 62.5,56
  Top 0.3: 62.5,56 R52.1
LED_CENTER11
  Top 0.254: LED59.A LED58.C LED57.C LED56.A 31.8,60.95 31.8,60.1 59.68,60.1 IC12.1 62.5,61.2
  Top 0.3: 62.5,61.2 R57.1
LED_CENTER12
  Top 0.254: LED64.A LED63.C LED62.C LED61.A 31.8,66.15 31.8,65.3 59.68,65.3 IC13.1 62.5,66.4
  Top 0.3: 62.5,66.4 R62.1
LED_CENTER13
  Top 0.254: LED69.A LED68.C LED67.C LED66.A 31.8,71.35 31.8,70.5 59.68,70.5 IC14.1 62.5,71.6
  Top 0.3: 62.5,71.6 R67.1
LED_CENTER14
  Top 0.254: LED74.A LED73.C LED72.C LED71.A 31.8,76.55 31.8,75.7 59.68,75.7 IC15.1 62.5,76.8
  Top 0.3: 62.5,76.8 R72.1
LED_CENTER15
  Top 0.254: LED79.A LED78.C LED77.C LED76.A 31.8,81.75 31.8,80.9 59.68,80.9 IC16.1 62.5,82
  Top 0.3: 62.5,82 R77.1
LED_CENTER16
  Top 0.254: LED84.A LED83.C LED82.C LED81.A 31.8,86.95 31.8,86.1 59.68,86.1 IC17.1 62.5,87.2
  Top 0.3: 62.5,87.2 R82.1
LED_CENTER17
  Top 0.254: LED89.A LED88.C LED87.C LED86.A 31.8,92.15 31.8,91.3 59.68,91.3 IC18.1 62.5,92.4
  Top 0.3: 62.5,92.4 R87.1
LED_CENTER18
  Top 0.254: LED94.A LED93.C LED92.C LED91.A 31.8,97.35 31.8,96.5 59.68,96.5 IC19.1 62.5,97.6
  Top 0.3: 62.5,97.6 R92.1
LED_ONE
  Top 0.254: R3.2 57.48,1.7
  Top 0.3: 57.48,1.7 arc-90 IC1.4
LED_ONE1
  Top 0.254: R8.2 57.48,6.9
  Top 0.3: 57.48,6.9 arc-90 IC2.4
LED_ONE2
  Top 0.254: R13.2 57.48,12.1
  Top 0.3: 57.48,12.1 arc-90 IC3.4
LED_ONE3
  Top 0.254: R18.2 57.48,17.3
  Top 0.3: 57.48,17.3 arc-90 IC4.4
LED_ONE4
  Top 0.254: R23.2 57.48,22.5
  Top 0.3: 57.48,22.5 arc-90 IC5.4
LED_ONE5
  Top 0.254: R28.2 57.48,27.7
  Top 0.3: 57.48,27.7 arc-90 IC6.4
LED_ONE6
  Top 0.254: R33.2 57.48,32.9
  Top 0.3: 57.48,32.9 arc-90 IC7.4
LED_ONE7
  Top 0.254: R38.2 57.48,38.1
  Top 0.3: 57.48,38.1 arc-90 IC8.4
LED_ONE8
  Top 0.254: R43.2 57.48,43.3
  Top 0.3: 57.48,43.3 arc-90 IC9.4
LED_ONE9
  Top 0.254: R48.2 57.48,48.5
  Top 0.3: 57.48,48.5 arc-90 IC10.4
LED_ONE10
  Top 0.254: R53.2 57.48,53.7
  Top 0.3: 57.48,53.7 arc-90 IC11.4
LED_ONE11
  Top 0.254: R58.2 57.48,58.9
  Top 0.3: 57.48,58.9 arc-90 IC12.4
LED_ONE12
  Top 0.254: R63.2 57.48,64.1
  Top 0.3: 57.48,64.1 arc-90 IC13.4
LED_ONE13
  Top 0.254: R68.2 57.48,69.3
  Top 0.3: 57.48,69.3 arc-90 IC14.4
LED_ONE14
  Top 0.254: R73.2 57.48,74.5
  Top 0.3: 57.48,74.5 arc-90 IC15.4
LED_ONE15
  Top 0.254: R78.2 57.48,79.7
  Top 0.3: 57.48,79.7 arc-90 IC16.4
LED_ONE16
  Top 0.254: R83.2 57.48,84.9
  Top 0.3: 57.48,84.9 arc-90 IC17.4
LED_ONE17
  Top 0.254: R88.2 57.48,90.1
  Top 0.3: 57.48,90.1 arc-90 IC18.4
LED_ONE18
  Top 0.254: R93.2 57.48,95.3
  Top 0.3: 57.48,95.3 arc-90 IC19.4
LED_TWO
  Top 0.254: 38.14,4 IC1.3
  Top 0.3: R4.2 38.14,4
LED_TWO1
  Top 0.254: 38.14,9.2 IC2.3
  Top 0.3: R9.2 38.14,9.2
LED_TWO2
  Top 0.254: 38.14,14.4 IC3.3
  Top 0.3: R14.2 38.14,14.4
LED_TWO3
  Top 0.254: 38.14,19.6 IC4.3
  Top 0.3: R19.2 38.14,19.6
LED_TWO4
  Top 0.254: 38.14,24.8 IC5.3
  Top 0.3: R24.2 38.14,24.8
LED_TWO5
  Top 0.254: 38.14,30 IC6.3
  Top 0.3: R29.2 38.14,30
LED_TWO6
  Top 0.254: 38.14,35.2 IC7.3
  Top 0.3: R34.2 38.14,35.2
LED_TWO7
  Top 0.254: 38.14,40.4 IC8.3
  Top 0.3: R39.2 38.14,40.4
LED_TWO8
  Top 0.254: 38.14,45.6 IC9.3
  Top 0.3: R44.2 38.14,45.6
LED_TWO9
  Top 0.254: 38.14,50.8 IC10.3
  Top 0.3: R49.2 38.14,50.8
LED_TWO10
  Top 0.254: 38.14,56 IC11.3
  Top 0.3: R54.2 38.14,56
LED_TWO11
  Top 0.254: 38.14,61.2 IC12.3
  Top 0.3: R59.2 38.14,61.2
LED_TWO12
  Top 0.254: 38.14,66.4 IC13.3
  Top 0.3: R64.2 38.14,66.4
LED_TWO13
  Top 0.254: 38.14,71.6 IC14.3
  Top 0.3: R69.2 38.14,71.6
LED_TWO14
  Top 0.254: 38.14,76.8 IC15.3
  Top 0.3: R74.2 38.14,76.8
LED_TWO15
  Top 0.254: 38.14,82 IC16.3
  Top 0.3: R79.2 38.14,82
LED_TWO16
  Top 0.254: 38.14,87.2 IC17.3
  Top 0.3: R84.2 38.14,87.2
LED_TWO17
  Top 0.254: 38.14,92.4 IC18.3
  Top 0.3: R89.2 38.14,92.4
LED_TWO18
  Top 0.254: 38.14,97.6 IC19.3
  Top 0.3: R94.2 38.14,97.6
N$1
  Top 0.254: LED5.C 76.4,3.46 76.26,3.46 R5.2
N$2
  Top 0.254: 92.5,1.6 VCC.1
  Top 0.914: PTC1.2 92.5,1.6
N$3
  Top 0.254: LED7.A LED6.C 36.06,6.85
  Top 0.3: 36.06,6.85 R8.1
N$4
  Top 0.254: LED8.A 14.1,6.85 14.1,9.9 36.06,9.9 R9.1
  Top 0.3: LED8.A LED9.C
N$5
  Top 0.254: LED2.A LED1.C 36.06,1.65
  Top 0.3: 36.06,1.65 R3.1
N$6
  Top 0.254: LED3.A 14.1,1.65 14.1,4.7 36.06,4.7 R4.1
  Top 0.3: LED3.A LED4.C
N$7  (via drill 1 pad 2.54)
  Top 0.254: R6.2 v7.5,7.9 TP3.TP
  Bottom 0.254: TP4.TP 2.87,7.9 v7.5,7.9
N$8
  Top 0.254: LED10.C 76.4,8.66 76.26,8.66 R10.2
N$9  (via drill 1 pad 2.54)
  Top 0.254: R1.2 v7.5,2.7 TP1.TP
  Bottom 0.254: TP2.TP 2.87,2.7 v7.5,2.7
N$10
  Top 0.254: 92.5,6.8 VCC1.1
  Top 0.914: PTC2.2 92.5,6.8
N$11
  Top 0.254: LED12.A LED11.C 36.06,12.05
  Top 0.3: 36.06,12.05 R13.1
N$12
  Top 0.254: LED13.A 14.1,12.05 14.1,15.1 36.06,15.1 R14.1
  Top 0.3: LED13.A LED14.C
N$13  (via drill 1 pad 2.54)
  Top 0.254: R11.2 v7.5,13.1 TP5.TP
  Bottom 0.254: TP6.TP 2.87,13.1 v7.5,13.1
N$14
  Top 0.254: LED15.C 76.4,13.86 76.26,13.86 R15.2
N$15
  Top 0.254: 92.5,12 VCC2.1
  Top 0.914: PTC3.2 92.5,12
N$16
  Top 0.254: LED17.A LED16.C 36.06,17.25
  Top 0.3: 36.06,17.25 R18.1
N$17
  Top 0.254: LED18.A 14.1,17.25 14.1,20.3 36.06,20.3 R19.1
  Top 0.3: LED18.A LED19.C
N$18  (via drill 1 pad 2.54)
  Top 0.254: R16.2 v7.5,18.3 TP7.TP
  Bottom 0.254: TP8.TP 2.87,18.3 v7.5,18.3
N$19
  Top 0.254: LED20.C 76.4,19.06 76.26,19.06 R20.2
N$20
  Top 0.254: 92.5,17.2 VCC3.1
  Top 0.914: PTC4.2 92.5,17.2
N$21
  Top 0.254: LED22.A LED21.C 36.06,22.45
  Top 0.3: 36.06,22.45 R23.1
N$22
  Top 0.254: LED23.A 14.1,22.45 14.1,25.5 36.06,25.5 R24.1
  Top 0.3: LED23.A LED24.C
N$23  (via drill 1 pad 2.54)
  Top 0.254: R21.2 v7.5,23.5 TP9.TP
  Bottom 0.254: TP10.TP 2.87,23.5 v7.5,23.5
N$24
  Top 0.254: LED25.C 76.4,24.26 76.26,24.26 R25.2
N$25
  Top 0.254: 92.5,22.4 VCC4.1
  Top 0.914: PTC5.2 92.5,22.4
N$26
  Top 0.254: LED27.A LED26.C 36.06,27.65
  Top 0.3: 36.06,27.65 R28.1
N$27
  Top 0.254: LED28.A 14.1,27.65 14.1,30.7 36.06,30.7 R29.1
  Top 0.3: LED28.A LED29.C
N$28  (via drill 1 pad 2.54)
  Top 0.254: R26.2 v7.5,28.7 TP11.TP
  Bottom 0.254: TP12.TP 2.87,28.7 v7.5,28.7
N$29
  Top 0.254: LED30.C 76.4,29.46 76.26,29.46 R30.2
N$30
  Top 0.254: 92.5,27.6 VCC5.1
  Top 0.914: PTC6.2 92.5,27.6
N$31
  Top 0.254: LED32.A LED31.C 36.06,32.85
  Top 0.3: 36.06,32.85 R33.1
N$32
  Top 0.254: LED33.A 14.1,32.85 14.1,35.9 36.06,35.9 R34.1
  Top 0.3: LED33.A LED34.C
N$33  (via drill 1 pad 2.54)
  Top 0.254: R31.2 v7.5,33.9 TP13.TP
  Bottom 0.254: TP14.TP 2.87,33.9 v7.5,33.9
N$34
  Top 0.254: LED35.C 76.4,34.66 76.26,34.66 R35.2
N$35
  Top 0.254: 92.5,32.8 VCC6.1
  Top 0.914: PTC7.2 92.5,32.8
N$36
  Top 0.254: LED37.A LED36.C 36.06,38.05
  Top 0.3: 36.06,38.05 R38.1
N$37
  Top 0.254: LED38.A 14.1,38.05 14.1,41.1 36.06,41.1 R39.1
  Top 0.3: LED38.A LED39.C
N$38  (via drill 1 pad 2.54)
  Top 0.254: R36.2 v7.5,39.1 TP15.TP
  Bottom 0.254: TP16.TP 2.87,39.1 v7.5,39.1
N$39
  Top 0.254: LED40.C 76.4,39.86 76.26,39.86 R40.2
N$40
  Top 0.254: 92.5,38 VCC7.1
  Top 0.914: PTC8.2 92.5,38
N$41
  Top 0.254: LED42.A LED41.C 36.06,43.25
  Top 0.3: 36.06,43.25 R43.1
N$42
  Top 0.254: LED43.A 14.1,43.25 14.1,46.3 36.06,46.3 R44.1
  Top 0.3: LED43.A LED44.C
N$43  (via drill 1 pad 2.54)
  Top 0.254: R41.2 v7.5,44.3 TP17.TP
  Bottom 0.254: TP18.TP 2.87,44.3 v7.5,44.3
N$44
  Top 0.254: LED45.C 76.4,45.06 76.26,45.06 R45.2
N$45
  Top 0.254: 92.5,43.2 VCC8.1
  Top 0.914: PTC9.2 92.5,43.2
N$46
  Top 0.254: LED47.A LED46.C 36.06,48.45
  Top 0.3: 36.06,48.45 R48.1
N$47
  Top 0.254: LED48.A 14.1,48.45 14.1,51.5 36.06,51.5 R49.1
  Top 0.3: LED48.A LED49.C
N$48  (via drill 1 pad 2.54)
  Top 0.254: R46.2 v7.5,49.5 TP19.TP
  Bottom 0.254: TP20.TP 2.87,49.5 v7.5,49.5
N$49
  Top 0.254: LED50.C 76.4,50.26 76.26,50.26 R50.2
N$50
  Top 0.254: 92.5,48.4 VCC9.1
  Top 0.914: PTC10.2 92.5,48.4
N$51
  Top 0.254: LED52.A LED51.C 36.06,53.65
  Top 0.3: 36.06,53.65 R53.1
N$52
  Top 0.254: LED53.A 14.1,53.65 14.1,56.7 36.06,56.7 R54.1
  Top 0.3: LED53.A LED54.C
N$53  (via drill 1 pad 2.54)
  Top 0.254: R51.2 v7.5,54.7 TP21.TP
  Bottom 0.254: TP22.TP 2.87,54.7 v7.5,54.7
N$54
  Top 0.254: LED55.C 76.4,55.46 76.26,55.46 R55.2
N$55
  Top 0.254: 92.5,53.6 VCC10.1
  Top 0.914: PTC11.2 92.5,53.6
N$56
  Top 0.254: LED57.A LED56.C 36.06,58.85
  Top 0.3: 36.06,58.85 R58.1
N$57
  Top 0.254: LED58.A 14.1,58.85 14.1,61.9 36.06,61.9 R59.1
  Top 0.3: LED58.A LED59.C
N$58  (via drill 1 pad 2.54)
  Top 0.254: R56.2 v7.5,59.9 TP23.TP
  Bottom 0.254: TP24.TP 2.87,59.9 v7.5,59.9
N$59
  Top 0.254: LED60.C 76.4,60.66 76.26,60.66 R60.2
N$60
  Top 0.254: 92.5,58.8 VCC11.1
  Top 0.914: PTC12.2 92.5,58.8
N$61
  Top 0.254: LED62.A LED61.C 36.06,64.05
  Top 0.3: 36.06,64.05 R63.1
N$62
  Top 0.254: LED63.A 14.1,64.05 14.1,67.1 36.06,67.1 R64.1
  Top 0.3: LED63.A LED64.C
N$63  (via drill 1 pad 2.54)
  Top 0.254: R61.2 v7.5,65.1 TP25.TP
  Bottom 0.254: TP26.TP 2.87,65.1 v7.5,65.1
N$64
  Top 0.254: LED65.C 76.4,65.86 76.26,65.86 R65.2
N$65
  Top 0.254: 92.5,64 VCC12.1
  Top 0.914: PTC13.2 92.5,64
N$66
  Top 0.254: LED67.A LED66.C 36.06,69.25
  Top 0.3: 36.06,69.25 R68.1
N$67
  Top 0.254: LED68.A 14.1,69.25 14.1,72.3 36.06,72.3 R69.1
  Top 0.3: LED68.A LED69.C
N$68  (via drill 1 pad 2.54)
  Top 0.254: R66.2 v7.5,70.3 TP27.TP
  Bottom 0.254: TP28.TP 2.87,70.3 v7.5,70.3
N$69
  Top 0.254: LED70.C 76.4,71.06 76.26,71.06 R70.2
N$70
  Top 0.254: 92.5,69.2 VCC13.1
  Top 0.914: PTC14.2 92.5,69.2
N$71
  Top 0.254: LED72.A LED71.C 36.06,74.45
  Top 0.3: 36.06,74.45 R73.1
N$72
  Top 0.254: LED73.A 14.1,74.45 14.1,77.5 36.06,77.5 R74.1
  Top 0.3: LED73.A LED74.C
N$73  (via drill 1 pad 2.54)
  Top 0.254: R71.2 v7.5,75.5 TP29.TP
  Bottom 0.254: TP30.TP 2.87,75.5 v7.5,75.5
N$74
  Top 0.254: LED75.C 76.4,76.26 76.26,76.26 R75.2
N$75
  Top 0.254: 92.5,74.4 VCC14.1
  Top 0.914: PTC15.2 92.5,74.4
N$76
  Top 0.254: LED77.A LED76.C 36.06,79.65
  Top 0.3: 36.06,79.65 R78.1
N$77
  Top 0.254: LED78.A 14.1,79.65 14.1,82.7 36.06,82.7 R79.1
  Top 0.3: LED78.A LED79.C
N$78  (via drill 1 pad 2.54)
  Top 0.254: R76.2 v7.5,80.7 TP31.TP
  Bottom 0.254: TP32.TP 2.87,80.7 v7.5,80.7
N$79
  Top 0.254: LED80.C 76.4,81.46 76.26,81.46 R80.2
N$80
  Top 0.254: 92.5,79.6 VCC15.1
  Top 0.914: PTC16.2 92.5,79.6
N$81
  Top 0.254: LED82.A LED81.C 36.06,84.85
  Top 0.3: 36.06,84.85 R83.1
N$82
  Top 0.254: LED83.A 14.1,84.85 14.1,87.9 36.06,87.9 R84.1
  Top 0.3: LED83.A LED84.C
N$83  (via drill 1 pad 2.54)
  Top 0.254: R81.2 v7.5,85.9 TP33.TP
  Bottom 0.254: TP34.TP 2.87,85.9 v7.5,85.9
N$84
  Top 0.254: LED85.C 76.4,86.66 76.26,86.66 R85.2
N$85
  Top 0.254: 92.5,84.8 VCC16.1
  Top 0.914: PTC17.2 92.5,84.8
N$86
  Top 0.254: LED87.A LED86.C 36.06,90.05
  Top 0.3: 36.06,90.05 R88.1
N$87
  Top 0.254: LED88.A 14.1,90.05 14.1,93.1 36.06,93.1 R89.1
  Top 0.3: LED88.A LED89.C
N$88  (via drill 1 pad 2.54)
  Top 0.254: R86.2 v7.5,91.1 TP35.TP
  Bottom 0.254: TP36.TP 2.87,91.1 v7.5,91.1
N$89
  Top 0.254: LED90.C 76.4,91.86 76.26,91.86 R90.2
N$90
  Top 0.254: 92.5,90 VCC17.1
  Top 0.914: PTC18.2 92.5,90
N$91
  Top 0.254: LED92.A LED91.C 36.06,95.25
  Top 0.3: 36.06,95.25 R93.1
N$92
  Top 0.254: LED93.A 14.1,95.25 14.1,98.3 36.06,98.3 R94.1
  Top 0.3: LED93.A LED94.C
N$93  (via drill 1 pad 2.54)
  Top 0.254: R91.2 v7.5,96.3 TP37.TP
  Bottom 0.254: TP38.TP 2.87,96.3 v7.5,96.3
N$94
  Top 0.254: LED95.C 76.4,97.06 76.26,97.06 R95.2
N$95
  Top 0.254: 92.5,95.2 VCC18.1
  Top 0.914: PTC19.2 92.5,95.2
SENSE
  Top 0.254: 59.74,0.45 12.89,0.45 R1.1 | 59.74,0.45 60,0.45 62.8,0.45 | 62.8,0.45 R2.2 | IC1.6 59.68,0.45 59.74,0.45 | D2.3 67.5,2.6 67.5,0.45 62.8,0.45
SENSE1
  Top 0.254: 59.74,5.65 12.89,5.65 R6.1 | 59.74,5.65 60,5.65 62.8,5.65 | 62.8,5.65 R7.2 | IC2.6 59.68,5.65 59.74,5.65 | D3.3 67.5,7.8 67.5,5.65 62.8,5.65
SENSE2
  Top 0.254: 59.74,10.85 12.89,10.85 R11.1 | 59.74,10.85 60,10.85 62.8,10.85 | 62.8,10.85 R12.2 | IC3.6 59.68,10.85 59.74,10.85 | D5.3 67.5,13 67.5,10.85 62.8,10.85
SENSE3
  Top 0.254: 59.74,16.05 12.89,16.05 R16.1 | 59.74,16.05 60,16.05 62.8,16.05 | 62.8,16.05 R17.2 | IC4.6 59.68,16.05 59.74,16.05 | D7.3 67.5,18.2 67.5,16.05 62.8,16.05
SENSE4
  Top 0.254: 59.74,21.25 12.89,21.25 R21.1 | 59.74,21.25 60,21.25 62.8,21.25 | 62.8,21.25 R22.2 | IC5.6 59.68,21.25 59.74,21.25 | D9.3 67.5,23.4 67.5,21.25 62.8,21.25
SENSE5
  Top 0.254: 59.74,26.45 12.89,26.45 R26.1 | 59.74,26.45 60,26.45 62.8,26.45 | 62.8,26.45 R27.2 | IC6.6 59.68,26.45 59.74,26.45 | D11.3 67.5,28.6 67.5,26.45 62.8,26.45
SENSE6
  Top 0.254: 59.74,31.65 12.89,31.65 R31.1 | 59.74,31.65 60,31.65 62.8,31.65 | 62.8,31.65 R32.2 | IC7.6 59.68,31.65 59.74,31.65 | D13.3 67.5,33.8 67.5,31.65 62.8,31.65
SENSE7
  Top 0.254: 59.74,36.85 12.89,36.85 R36.1 | 59.74,36.85 60,36.85 62.8,36.85 | 62.8,36.85 R37.2 | IC8.6 59.68,36.85 59.74,36.85 | D15.3 67.5,39 67.5,36.85 62.8,36.85
SENSE8
  Top 0.254: 59.74,42.05 12.89,42.05 R41.1 | 59.74,42.05 60,42.05 62.8,42.05 | 62.8,42.05 R42.2 | IC9.6 59.68,42.05 59.74,42.05 | D17.3 67.5,44.2 67.5,42.05 62.8,42.05
SENSE9
  Top 0.254: 59.74,47.25 12.89,47.25 R46.1 | 59.74,47.25 60,47.25 62.8,47.25 | 62.8,47.25 R47.2 | IC10.6 59.68,47.25 59.74,47.25 | D19.3 67.5,49.4 67.5,47.25 62.8,47.25
SENSE10
  Top 0.254: 59.74,52.45 12.89,52.45 R51.1 | 59.74,52.45 60,52.45 62.8,52.45 | 62.8,52.45 R52.2 | IC11.6 59.68,52.45 59.74,52.45 | D21.3 67.5,54.6 67.5,52.45 62.8,52.45
SENSE11
  Top 0.254: 59.74,57.65 12.89,57.65 R56.1 | 59.74,57.65 60,57.65 62.8,57.65 | 62.8,57.65 R57.2 | IC12.6 59.68,57.65 59.74,57.65 | D23.3 67.5,59.8 67.5,57.65 62.8,57.65
SENSE12
  Top 0.254: 59.74,62.85 12.89,62.85 R61.1 | 59.74,62.85 60,62.85 62.8,62.85 | 62.8,62.85 R62.2 | IC13.6 59.68,62.85 59.74,62.85 | D25.3 67.5,65 67.5,62.85 62.8,62.85
SENSE13
  Top 0.254: 59.74,68.05 12.89,68.05 R66.1 | 59.74,68.05 60,68.05 62.8,68.05 | 62.8,68.05 R67.2 | IC14.6 59.68,68.05 59.74,68.05 | D27.3 67.5,70.2 67.5,68.05 62.8,68.05
SENSE14
  Top 0.254: 59.74,73.25 12.89,73.25 R71.1 | 59.74,73.25 60,73.25 62.8,73.25 | 62.8,73.25 R72.2 | IC15.6 59.68,73.25 59.74,73.25 | D29.3 67.5,75.4 67.5,73.25 62.8,73.25
SENSE15
  Top 0.254: 59.74,78.45 12.89,78.45 R76.1 | 59.74,78.45 60,78.45 62.8,78.45 | 62.8,78.45 R77.2 | IC16.6 59.68,78.45 59.74,78.45 | D31.3 67.5,80.6 67.5,78.45 62.8,78.45
SENSE16
  Top 0.254: 59.74,83.65 12.89,83.65 R81.1 | 59.74,83.65 60,83.65 62.8,83.65 | 62.8,83.65 R82.2 | IC17.6 59.68,83.65 59.74,83.65 | D33.3 67.5,85.8 67.5,83.65 62.8,83.65
SENSE17
  Top 0.254: 59.74,88.85 12.89,88.85 R86.1 | 59.74,88.85 60,88.85 62.8,88.85 | 62.8,88.85 R87.2 | IC18.6 59.68,88.85 59.74,88.85 | D35.3 67.5,91 67.5,88.85 62.8,88.85
SENSE18
  Top 0.254: 59.74,94.05 12.89,94.05 R91.1 | 59.74,94.05 60,94.05 62.8,94.05 | 62.8,94.05 R92.2 | IC19.6 59.68,94.05 59.74,94.05 | D37.3 67.5,96.2 67.5,94.05 62.8,94.05
VCC19
  Top 0.254: 84.35,1.6 D1.C 84.15,0.4 83.8,0.4 76.4,0.4 | 76.4,0.4 71.2,0.4 C1.1 71.2,2 69.4,2 69.4,3.6 68.8,3.6 66.2,3.6 66.2,2.6 | 76.4,0.4 LED5.A | 66.2,2.6 60.8,2.6 60.8,2.4 58.8,2.4 58.8,1.4 IC1.5 | 66.2,2.6 66.2,1.65 D2.2
  Top 0.914: 84.35,1.6 PTC1.1
VCC20
  Top 0.254: 84.35,6.8 D4.C 84.15,5.6 83.8,5.6 76.4,5.6 | 76.4,5.6 71.2,5.6 C2.1 71.2,7.2 69.4,7.2 69.4,8.8 68.8,8.8 66.2,8.8 66.2,7.8 | 76.4,5.6 LED10.A | 66.2,7.8 60.8,7.8 60.8,7.6 58.8,7.6 58.8,6.6 IC2.5 | 66.2,7.8 66.2,6.85 D3.2
  Top 0.914: 84.35,6.8 PTC2.1
VCC21
  Top 0.254: 84.35,12 D6.C 84.15,10.8 83.8,10.8 76.4,10.8 | 76.4,10.8 71.2,10.8 C3.1 71.2,12.4 69.4,12.4 69.4,14 68.8,14 66.2,14 66.2,13 | 76.4,10.8 LED15.A | 66.2,13 60.8,13 60.8,12.8 58.8,12.8 58.8,11.8 IC3.5 | 66.2,13 66.2,12.05 D5.2
  Top 0.914: 84.35,12 PTC3.1
VCC22
  Top 0.254: 84.35,17.2 D8.C 84.15,16 83.8,16 76.4,16 | 76.4,16 71.2,16 C4.1 71.2,17.6 69.4,17.6 69.4,19.2 68.8,19.2 66.2,19.2 66.2,18.2 | 76.4,16 LED20.A | 66.2,18.2 60.8,18.2 60.8,18 58.8,18 58.8,17 IC4.5 | 66.2,18.2 66.2,17.25 D7.2
  Top 0.914: 84.35,17.2 PTC4.1
VCC23
  Top 0.254: 84.35,22.4 D10.C 84.15,21.2 83.8,21.2 76.4,21.2 | 76.4,21.2 71.2,21.2 C5.1 71.2,22.8 69.4,22.8 69.4,24.4 68.8,24.4 66.2,24.4 66.2,23.4 | 76.4,21.2 LED25.A | 66.2,23.4 60.8,23.4 60.8,23.2 58.8,23.2 58.8,22.2 IC5.5 | 66.2,23.4 66.2,22.45 D9.2
  Top 0.914: 84.35,22.4 PTC5.1
VCC24
  Top 0.254: 84.35,27.6 D12.C 84.15,26.4 83.8,26.4 76.4,26.4 | 76.4,26.4 71.2,26.4 C6.1 71.2,28 69.4,28 69.4,29.6 68.8,29.6 66.2,29.6 66.2,28.6 | 76.4,26.4 LED30.A | 66.2,28.6 60.8,28.6 60.8,28.4 58.8,28.4 58.8,27.4 IC6.5 | 66.2,28.6 66.2,27.65 D11.2
  Top 0.914: 84.35,27.6 PTC6.1
VCC25
  Top 0.254: 84.35,32.8 D14.C 84.15,31.6 83.8,31.6 76.4,31.6 | 76.4,31.6 71.2,31.6 C7.1 71.2,33.2 69.4,33.2 69.4,34.8 68.8,34.8 66.2,34.8 66.2,33.8 | 76.4,31.6 LED35.A | 66.2,33.8 60.8,33.8 60.8,33.6 58.8,33.6 58.8,32.6 IC7.5 | 66.2,33.8 66.2,32.85 D13.2
  Top 0.914: 84.35,32.8 PTC7.1
VCC26
  Top 0.254: 84.35,38 D16.C 84.15,36.8 83.8,36.8 76.4,36.8 | 76.4,36.8 71.2,36.8 C8.1 71.2,38.4 69.4,38.4 69.4,40 68.8,40 66.2,40 66.2,39 | 76.4,36.8 LED40.A | 66.2,39 60.8,39 60.8,38.8 58.8,38.8 58.8,37.8 IC8.5 | 66.2,39 66.2,38.05 D15.2
  Top 0.914: 84.35,38 PTC8.1
VCC27
  Top 0.254: 84.35,43.2 D18.C 84.15,42 83.8,42 76.4,42 | 76.4,42 71.2,42 C9.1 71.2,43.6 69.4,43.6 69.4,45.2 68.8,45.2 66.2,45.2 66.2,44.2 | 76.4,42 LED45.A | 66.2,44.2 60.8,44.2 60.8,44 58.8,44 58.8,43 IC9.5 | 66.2,44.2 66.2,43.25 D17.2
  Top 0.914: 84.35,43.2 PTC9.1
VCC28
  Top 0.254: 84.35,48.4 D20.C 84.15,47.2 83.8,47.2 76.4,47.2 | 76.4,47.2 71.2,47.2 C10.1 71.2,48.8 69.4,48.8 69.4,50.4 68.8,50.4 66.2,50.4 66.2,49.4 | 76.4,47.2 LED50.A | 66.2,49.4 60.8,49.4 60.8,49.2 58.8,49.2 58.8,48.2 IC10.5 | 66.2,49.4 66.2,48.45 D19.2
  Top 0.914: 84.35,48.4 PTC10.1
VCC29
  Top 0.254: 84.35,53.6 D22.C 84.15,52.4 83.8,52.4 76.4,52.4 | 76.4,52.4 71.2,52.4 C11.1 71.2,54 69.4,54 69.4,55.6 68.8,55.6 66.2,55.6 66.2,54.6 | 76.4,52.4 LED55.A | 66.2,54.6 60.8,54.6 60.8,54.4 58.8,54.4 58.8,53.4 IC11.5 | 66.2,54.6 66.2,53.65 D21.2
  Top 0.914: 84.35,53.6 PTC11.1
VCC30
  Top 0.254: 84.35,58.8 D24.C 84.15,57.6 83.8,57.6 76.4,57.6 | 76.4,57.6 71.2,57.6 C12.1 71.2,59.2 69.4,59.2 69.4,60.8 68.8,60.8 66.2,60.8 66.2,59.8 | 76.4,57.6 LED60.A | 66.2,59.8 60.8,59.8 60.8,59.6 58.8,59.6 58.8,58.6 IC12.5 | 66.2,59.8 66.2,58.85 D23.2
  Top 0.914: 84.35,58.8 PTC12.1
VCC31
  Top 0.254: 84.35,64 D26.C 84.15,62.8 83.8,62.8 76.4,62.8 | 76.4,62.8 71.2,62.8 C13.1 71.2,64.4 69.4,64.4 69.4,66 68.8,66 66.2,66 66.2,65 | 76.4,62.8 LED65.A | 66.2,65 60.8,65 60.8,64.8 58.8,64.8 58.8,63.8 IC13.5 | 66.2,65 66.2,64.05 D25.2
  Top 0.914: 84.35,64 PTC13.1
VCC32
  Top 0.254: 84.35,69.2 D28.C 84.15,68 83.8,68 76.4,68 | 76.4,68 71.2,68 C14.1 71.2,69.6 69.4,69.6 69.4,71.2 68.8,71.2 66.2,71.2 66.2,70.2 | 76.4,68 LED70.A | 66.2,70.2 60.8,70.2 60.8,70 58.8,70 58.8,69 IC14.5 | 66.2,70.2 66.2,69.25 D27.2
  Top 0.914: 84.35,69.2 PTC14.1
VCC33
  Top 0.254: 84.35,74.4 D30.C 84.15,73.2 83.8,73.2 76.4,73.2 | 76.4,73.2 71.2,73.2 C15.1 71.2,74.8 69.4,74.8 69.4,76.4 68.8,76.4 66.2,76.4 66.2,75.4 | 76.4,73.2 LED75.A | 66.2,75.4 60.8,75.4 60.8,75.2 58.8,75.2 58.8,74.2 IC15.5 | 66.2,75.4 66.2,74.45 D29.2
  Top 0.914: 84.35,74.4 PTC15.1
VCC34
  Top 0.254: 84.35,79.6 D32.C 84.15,78.4 83.8,78.4 76.4,78.4 | 76.4,78.4 71.2,78.4 C16.1 71.2,80 69.4,80 69.4,81.6 68.8,81.6 66.2,81.6 66.2,80.6 | 76.4,78.4 LED80.A | 66.2,80.6 60.8,80.6 60.8,80.4 58.8,80.4 58.8,79.4 IC16.5 | 66.2,80.6 66.2,79.65 D31.2
  Top 0.914: 84.35,79.6 PTC16.1
VCC35
  Top 0.254: 84.35,84.8 D34.C 84.15,83.6 83.8,83.6 76.4,83.6 | 76.4,83.6 71.2,83.6 C17.1 71.2,85.2 69.4,85.2 69.4,86.8 68.8,86.8 66.2,86.8 66.2,85.8 | 76.4,83.6 LED85.A | 66.2,85.8 60.8,85.8 60.8,85.6 58.8,85.6 58.8,84.6 IC17.5 | 66.2,85.8 66.2,84.85 D33.2
  Top 0.914: 84.35,84.8 PTC17.1
VCC36
  Top 0.254: 84.35,90 D36.C 84.15,88.8 83.8,88.8 76.4,88.8 | 76.4,88.8 71.2,88.8 C18.1 71.2,90.4 69.4,90.4 69.4,92 68.8,92 66.2,92 66.2,91 | 76.4,88.8 LED90.A | 66.2,91 60.8,91 60.8,90.8 58.8,90.8 58.8,89.8 IC18.5 | 66.2,91 66.2,90.05 D35.2
  Top 0.914: 84.35,90 PTC18.1
VCC37
  Top 0.254: 84.35,95.2 D38.C 84.15,94 83.8,94 76.4,94 | 76.4,94 71.2,94 C19.1 71.2,95.6 69.4,95.6 69.4,97.2 68.8,97.2 66.2,97.2 66.2,96.2 | 76.4,94 LED95.A | 66.2,96.2 60.8,96.2 60.8,96 58.8,96 58.8,95 IC19.5 | 66.2,96.2 66.2,95.25 D37.2
  Top 0.914: 84.35,95.2 PTC19.1
(copper drawn outside any net)
  shapes: Top area x38